# EAGLE board RHA2132_headstage (EAGLE 6.2)
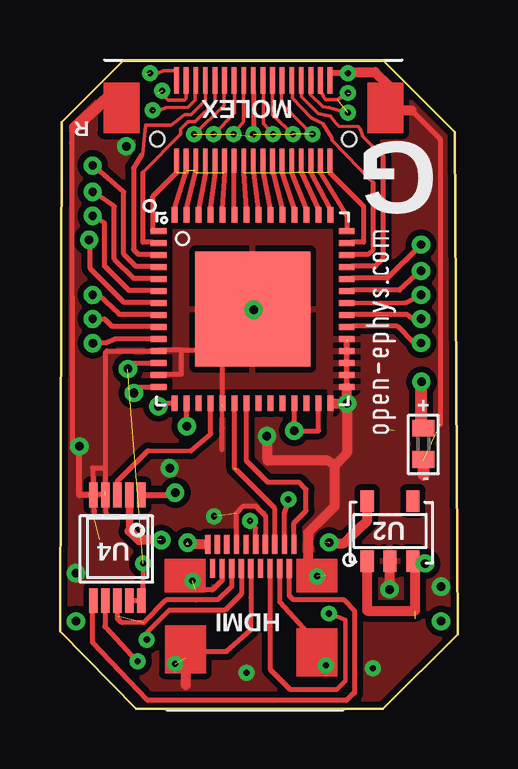
[diagram p0: board, top side]
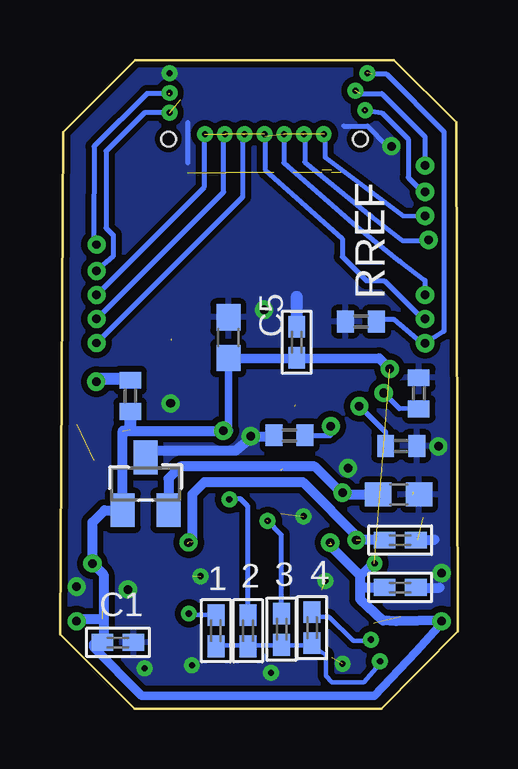
[diagram p1: board, bottom side, seen from below]

Size 16.59 x 27.06 mm. Coordinates in mm from the lower left corner, seen from the top.
Outline: 2.66,27.06 13.46,27.06 16.46,24.06 16.59,3.12 13.47,0 3.18,0 0,3.24 0.06,24.46 2.66,27.06
Copper layers (1*16): Top 0.0178mm / dielectric 59mil / Bottom 0.0178mm
Design rules: minimum track width 5mil, minimum drill 10mil, track to track 5mil, track to pad 5mil, pad to pad 5mil, via to via 5mil, smd to smd 0mil, copper to edge 5mil, drill to drill 10mil, minimum pad ring 8mil, minimum via ring 8mil, stop-mask expansion 3mil, vias tented up to drill 0mil, thermal gap 10mil
Net classes: 1 thick: width 1.016 mm; 2 power: width 0.61 mm

## Footprints (pad centres in the part's own frame; a part is rotated, then mirrored left to right if it is on the bottom)
C0402 = smd 0.9 x 0.7: 1 -0.65,0; 2 0.65,0
C0603 = smd 1.1 x 1: 1 -0.85,0; 2 0.85,0
MICRO_HDMI = smd 0.22 x 0.8: PIN1 1.8,1.4; PIN2 1.6,0.4; PIN3 1.4,1.4; PIN4 1.2,0.4; PIN5 1,1.4; PIN6 0.8,0.4; PIN7 0.6,1.4; PIN8 0.4,0.4; PIN9 0.2,1.4; PIN10 0,0.4; PIN11 -0.2,1.4; PIN12 -0.4,0.4; PIN13 -0.6,1.4; PIN14 -0.8,0.4; PIN15 -1,1.4; PIN16 -1.2,0.4; PIN17 -1.4,1.4; PIN18 -1.6,0.4; PIN19 -1.8,1.4
MOLEX_5033763410 = smd 0.2 x 1: P$1 -3.2,0.5; P$2 -2.8,0.5; P$3 -2.4,0.5; P$4 -2,0.5; P$5 -1.6,0.5; P$6 -1.2,0.5; P$7 -0.8,0.5; P$8 -0.4,0.5; P$9 0,0.5; P$10 0.4,0.5; P$11 0.8,0.5; P$12 1.2,0.5; P$13 1.6,0.5; P$14 2,0.5; P$15 2.4,0.5; P$16 2.8,0.5; P$17 3.2,0.5 | smd 0.2 x 1.1: P$18 3.2,-2.85; P$19 2.8,-2.85; P$20 2.4,-2.85; P$21 2,-2.85; P$22 1.6,-2.85; P$23 1.2,-2.85; P$24 0.8,-2.85; P$25 0.4,-2.85; P$26 0,-2.85; P$27 -0.4,-2.85; P$28 -0.8,-2.85; P$29 -1.2,-2.85; P$30 -1.6,-2.85; P$31 -2,-2.85; P$32 -2.4,-2.85; P$33 -2.8,-2.85; P$34 -3.2,-2.85 | hole 0.6: 4,-0.4; -4,-0.4
R0402 = smd 0.7 x 0.9: 1 -0.65,0; 2 0.65,0
TSOT-23-5 = smd 0.55 x 0.9: 1 -0.95,-1.25; 2 0,-1.25; 3 0.95,-1.25; 4 0.95,1.25; 5 -0.95,1.25
SOT23 = smd 1 x 1.4: 1 -0.95,-1.1; 2 0.95,-1.1; 3 0,1.1
MSOP-10 = smd 0.34 x 1.04: 1 -1,-2.2; 2 -0.5,-2.2; 3 0,-2.2; 4 0.5,-2.2; 5 1,-2.2; 6 1,2.2; 7 0.5,2.2; 8 0,2.2; 9 -0.5,2.2; 10 -1,2.2
QFN56_8_X_8 = smd 0.65 x 0.25: 1 -3.925,3.25; 2 -3.925,2.75; 3 -3.925,2.25; 4 -3.925,1.75; 5 -3.925,1.25; 6 -3.925,0.75; 7 -3.925,0.25; 8 -3.925,-0.25; 9 -3.925,-0.75; 10 -3.925,-1.25; 11 -3.925,-1.75; 12 -3.925,-2.25; 13 -3.925,-2.75; 14 -3.925,-3.25; 29 3.925,-3.25; 30 3.925,-2.75; 31 3.925,-2.25; 32 3.925,-1.75; 33 3.925,-1.25; 34 3.925,-0.75; 35 3.925,-0.25; 36 3.925,0.25; 37 3.925,0.75; 38 3.925,1.25; 39 3.925,1.75; 40 3.925,2.25; 41 3.925,2.75; 42 3.925,3.25 | smd 0.25 x 0.65: 15 -3.25,-3.925; 16 -2.75,-3.925; 17 -2.25,-3.925; 18 -1.75,-3.925; 19 -1.25,-3.925; 20 -0.75,-3.925; 21 -0.25,-3.925; 22 0.25,-3.925; 23 0.75,-3.925; 24 1.25,-3.925; 25 1.75,-3.925; 26 2.25,-3.925; 27 2.75,-3.925; 28 3.25,-3.925; 43 3.25,3.925; 44 2.75,3.925; 45 2.25,3.925; 46 1.75,3.925; 47 1.25,3.925; 48 0.75,3.925; 49 0.25,3.925; 50 -0.25,3.925; 51 -0.75,3.925; 52 -1.25,3.925; 53 -1.75,3.925; 54 -2.25,3.925; 55 -2.75,3.925; 56 -3.25,3.925 | smd 4.8 x 4.8: CENTER 0,0

## Placement (x,y rotation side)
1  [C0402]  10.08,3.26 270 bottom
2  [C0402]  8.75,3.26 270 bottom
3  [C0402]  7.35,3.32 270 bottom
4  [C0402]  6.07,3.39 270 bottom
C1  [C0402]  14.17,2.77 0 bottom
C5  [C0603]  9.56,15.48 90 bottom
C_ADC_1  [C0402]  2.4,5.07 0 bottom
C_REG  [C0402]  2.4,7.03 0 bottom
C_REG1  [C0402]  6.72,15.29 270 bottom
C_VREF  [C0603]  2.46,8.94 0 bottom
E$1  [MICRO_HDMI]  7.96,5.46 0 top
E$2  [MOLEX_5033763410]  8.06,23.36 180 top
LED  [R0402]  15.16,11.05 270 top
LED_R  [R0402]  13.66,13.05 270 bottom
RH1  RH1  [R0402]  1.63,13.16 270 bottom
RH2  RH2  [R0402]  2.36,10.96 180 bottom
RL  RL  [R0402]  7.02,11.41 0 bottom
RREF  [R0402]  4.04,16.15 180 bottom
U2  ADP1710  [TSOT-23-5]  13.76,7.42 0 top
U3  ADR381  [SOT23]  13.02,9.38 0 bottom
U4  AD7980-MSOP  [MSOP-10]  2.4,6.72 180 top
U5  RHA2132QFN  [QFN56_8_X_8]  8.04,16.68 0 top

## Library data of the parts
1-4 C1 C_ADC_1 C_REG C_REG1 U2-U4 = harrison
C5 C_VREF = rcl
E$1 E$2 = voigts
LED LED_R RH1 RH2 RL RREF = rcl-ez
U5 = intan

## Nets
AGND: C1.2 C5.2 C_VREF.2 RH1.1 RH2.1 RREF.2 U2.2 U4.4 U4.5 U5.11 U5.13 U5.28 U5.29 U5.30 U5.31 U5.32 U5.33 U5.CENTER
MUX_OUT: U4.3 U5.18
REFERENCE: U5.10
RESET: U5.20
S$1: RL.1
S$4: C_ADC_1.1
S$5: U4.9 U4.10
S$6: RREF.1
S$15: C_ADC_1.2
SCK: U4.8
SETH1: RH1.2 U5.14
SETH2: RH2.2 U5.15
SETL: RL.2 U5.16
V_REF: C_VREF.1 U3.2 U4.1
VDD: C1.1 C5.1 U2.1 U2.3 U3.1 U5.12 U5.25 U5.27
VREG_V: C_REG.1 U2.5 U4.2

## Tracks (layer width: path | path; a pad name or v marks a point on that pad's centre or on a via)
AGND  (via drill 0.25, 0.26 pad 0.25, 0.35, 0.36)  (10 unrouted)
  Top 0.178: 6.77,12.68 6.77,11.7 6.77,11.66
  Top 0.2: 1.46,8.96 1.86,8.96 | 4.26,13.96 5.06,13.96 5.06,14.96 | 5.06,14.96 4.1,14.96 4.11,14.96 4.26,14.96 | 5.06,14.96 5.86,14.96 | 6.76,5.56 6.76,5.36 6.36,4.96 5.66,4.96 | 1.86,10.06 1.36,10.06 1.43,7.99 | 11.96,13.26 11.96,15.36 | 14.66,24.96 15.86,23.76 15.86,11.86 | 2.06,25.46 1.96,25.46 | 0.63,24.25 0.48,24.11 0.48,23.6 0.5,10.88 0.86,10.96 | 6.79,12.61 6.79,14.76 | 1.86,9.06 1.93,8.06 | 7.36,7.16 7.36,8.16 7.66,8.46 8.16,8.46 8.56,8.06 8.56,7.06
  Top 0.203: U4.4 1.9,14.88 | 1.94,14.92 1.96,14.93 U5.11 | 6.77,11.7 6.74,11.67 6.74,10.81
  Top 0.254: U4.5 0.81,8.92 v0.81,10.95 | 11.96,14.77 U5.33
  Top 0.406: 11.06,5.56 10.26,5.56 | U2.2 13.76,5.28 v13.76,4.98 | 10.36,6.06 10.36,7.36 11.46,8.46 11.46,10.16 | 11.39,12.74 v11.96,12.74 U5.29 | 11.96,12.46 11.96,10.66 11.46,10.16 | 11.46,10.16 11.16,10.36 8.66,10.36 8.66,11.36 | 14.16,24.96 14.66,24.96 | 5.25,2.14 5.25,0.99
  Top 0.5: 15.16,10.36 15.16,9.76
  Top 0.508: 1.96,25.46 0.63,24.25
  Bottom 0.2: 11.26,24.46 11.26,22.76 | 4.76,24.31 3.76,24.31 2.96,23.46
  Bottom 0.406: 8.56,11.36 7.96,11.36 | 12.96,10.76 9.26,10.76 8.66,11.26 | 1.66,7.06 0.96,7.06 | 1.66,5.06 0.76,5.06
  Bottom 0.508: 6.71,15.98 6.71,17.18
  other vias: 8.08,16.64 10.73,5.54 0.67,5.66 4.58,10.04 12.01,26.51 6.43,8.04 5.53,5.34 8.63,11.37 2.76,23.46 11.09,1.82 15.9,5.1 7.79,1.5 13.06,1.69 4.8,1.88
  pour Bottom (isolate 0.254): 2.76,27.36 0.16,24.86 -0.14,2.69 2.86,-0.31 13.61,-0.31 17.16,2.94 17.06,24.16 13.76,27.36
  pour Top (isolate 0.254): 0.16,28.26 16.56,28.36 16.76,2.83 13.6,-0.19 3.05,-0.13 0.06,2.99
CNV
  Top 0.2: 12.26,0.68 11.94,0.35 3.66,0.35 1.36,2.78 1.36,4.26
MUX_OUT
  Top 0.203: U4.3 2.4,9.5 3.68,10.78 5.46,10.76 5.47,10.77 6.29,11.47 U5.18
N$1  (9 unrouted)
  Top 0.2: 8.86,22.36 8.86,22.46 9.26,20.86 | 7.66,22.36 7.76,20.86 | 8.06,22.36 8.26,20.86 | 8.46,22.36 8.76,20.86 | 9.26,22.36 9.76,20.86 | 9.66,22.36 10.26,20.86 | 10.06,22.36 10.76,20.86 | 10.46,22.36 11.26,20.86 | 10.86,22.36 11.96,20.56 11.96,19.96 | 11.26,22.36 12.66,20.96 12.66,19.46 12.16,19.46
N$8
  Top 0.2: 1.46,16.26 1.86,16.26 2.16,15.96 3.96,15.96
REFERENCE
  Top 0.203: U5.10 2.31,15.43 1.93,15.26 1.35,15.26
RESET  (1 unrouted)
  Top 0.2: 8.96,6.96 8.96,8.36 7.36,9.96
  Top 0.203: 7.29,10.03 U5.20
S$2  (via drill 0.35)
  other vias: 1.36,22.66
S$3
  Top 0.2: 3.96,16.46 2.46,16.46 1.62,17.26 1.32,17.26
S$4
  Bottom 0.406: 4.03,5.07 C_ADC_1.1
S$5
  Top 0.203: 3.49,6.04 3.43,4.83 U4.10 | U4.10 2.89,4.5 | U4.10 U4.9
S$6  (via drill 0.36)
  Top 0.203: 1.14,15.4 v1.37,15.25
  Bottom 0.203: RREF.1 3.16,16.26 2.66,16.25 1.43,15.21 v1.37,15.25 0.58,15.75
S$7  (via drill 0.26 pad 0.25)
  other vias: 7.93,7.84
S$8
  Top 0.2: 2.26,18.76 2.26,20.96 1.39,21.58
S$9  (via drill 0.36)
  other vias: 15.08,13.64
S$10
  Bottom 0.5: 13.76,13.76 15.06,13.76
S$11
  Top 0.2: 7.26,20.86 7.26,22.46
S$12
  Bottom 0.5: 13.66,12.26 13.66,11.76
S$13
  Top 0.2: 4.06,16.96 2.66,16.96 1.26,18.36 1.26,19.76 1.46,19.66
S$14
  Top 0.5: 15.06,11.86 15.06,13.56
S$16
  Top 0.178: 11.6,0.86 11.91,1.18 11.91,3.72 11.28,3.96 11.15,3.98
S$17
  Top 0.203: 3.48,3.61 2.58,3.6 2.39,3.79
S$19
  Top 0.2: 1.86,4.51 1.88,3.47 1.88,3.42 3.21,1.96 3.26,1.96
S$20  (via drill 0.26 pad 0.25)
  other vias: 9.53,8.74
S$21  (via drill 0.36)  (2 unrouted)
  Top 0.406: 6.06,6.86 5.26,6.86
  Bottom 0.406: 5.36,6.86 4.06,5.56 4.06,4.57 3.11,3.68 2.58,3.66 0.7,3.68
  other vias: 5.33,6.94
S$22  (via drill 0.26 pad 0.25)
  other vias: 3.62,2.89
S$23  (via drill 0.35)
  other vias: 1.36,16.26
S$25
  Top 0.178: 4.55,4.1 3.66,3.21 3.66,2.9
S$27
  Top 0.2: 3.96,17.46 2.86,17.46 1.86,18.46 1.86,20.26 1.38,20.56
S$28  (via drill 0.36)
  other vias: 0.67,3.65
S$29
  Bottom 0.178: 3.15,2.01 3.91,1.12 5.25,1.12 5.5,1.37 5.5,2.26 6.13,2.64 10.2,2.64 10.2,2.83
S$30  (via drill 0.36)
  other vias: 15.9,3.65
S$31
  Top 0.203: 6.92,2.39 7.94,3.27 7.96,4.65 7.96,5.69
S$32
  Top 0.2: 9.16,5.66 9.16,4.46 10.34,3.16
S$33
  Top 0.2: 4.06,18.96 3.26,18.96 3.06,19.16 3.06,22.56 3.41,23.11
S$34
  Top 0.2: 3.96,18.46 3.16,18.46 2.66,18.96 2.66,21.56 1.35,22.69
S$35
  Top 0.2: 2.26,18.76 3.06,17.96 4.06,17.96
S$36  (via drill 0.25)  (6 unrouted)
  Top 0.2: 8.06,25.76 v8.06,23.96
  Bottom 0.2: v8.06,23.96 8.06,23.86 8.03,23.86 8.03,22.49 4.81,19.61 4.81,18.86 3.81,17.86 3.06,17.86 2.06,16.86 1.46,16.26
  other vias: 5.59,23.96 6.41,23.96 7.24,23.96 8.89,23.96 9.71,23.96 10.54,23.96
S$37
  Top 0.2: 12.16,17.96 13.66,17.96 15.06,19.36
S$40
  Top 0.2: 3.86,19.46 3.46,19.46 3.46,22.36
S$41
  Top 0.2: 15.05,18.27 14.16,17.46 12.16,17.46
S$42
  Top 0.2: 13.46,23.06 13.46,18.76 13.16,18.46 12.16,18.46
S$43
  Top 0.2: 12.14,16.93 14.4,16.94 14.49,16.96 15.06,17.26
S$44  (via drill 0.25)
  other vias: 11.21,3.98
S$45
  Top 0.2: 12.16,16.46 14.46,16.46 14.7,16.29 15.1,16.29
S$46  (via drill 0.35)  (1 unrouted)
  Top 0.15: 7.66,25.76 7.66,24.48 7.24,23.96
  Bottom 0.2: 7.26,23.96 7.25,23.96 7.25,22.77 4.21,20.11 2.43,18.68 1.36,17.87 v1.36,17.26
S$47  (1 unrouted)
  Top 0.15: 6.44,23.96 7.29,24.86 7.29,25.76
  Bottom 0.2: 6.46,23.96 6.37,23.96 6.37,22.81 3.61,20.56 2.31,19.53 1.26,19.52
S$48  (5 unrouted)
  Top 0.2: 6.86,22.36 6.76,20.86 | 6.46,22.36 6.26,20.86 | 6.06,22.36 5.76,20.76 | 5.26,20.86 5.66,22.46 5.66,22.36 | 4.76,20.86 5.26,22.46 5.26,22.36 | 4.86,22.36 3.86,21.36 3.86,19.96
S$49  (via drill 0.25)  (2 unrouted)
  Top 0.15: 4.88,26.61 4.31,26.61 4.14,26.53 3.76,26.53
  Bottom 0.2: 0.56,15.77 0.56,24.06 2.96,26.46 3.56,26.46
  other vias: 3.76,26.51
S$50  (via drill 0.25)  (2 unrouted)
  Top 0.15: 5.26,25.76 5.26,25.46 5.19,25.38 4.51,25.38 4.36,25.53 4.29,25.78
  Bottom 0.2: 4.06,25.66 3.16,25.66 1.36,23.86 1.36,22.76
  other vias: 4.26,25.78
S$51  (1 unrouted)
  Top 0.15: 5.59,23.96 6.84,25.16 6.84,25.68
  Bottom 0.2: 5.56,23.96 5.53,23.96 5.53,23 2.28,20.57 1.35,20.56
S$52  (via drill 0.25)  (1 unrouted)
  Top 0.15: 3.88,24.95 4.15,24.97 4.42,25.08 5.34,25.08 5.64,25.38 5.64,25.76
  Bottom 0.2: v3.86,24.96 3.16,24.86 2.06,23.76 2.06,22.16 1.46,21.56
S$53
  Top 0.15: 6.46,25.76 6.46,25.31 5.64,24.48 5.34,24.48 5.04,24.18 5.04,23.96 3.46,22.38
S$54
  Top 0.15: 6.09,25.76 6.06,25.68 6.06,25.38 5.46,24.78 5.19,24.78 4.64,24.33 3.56,24.33 3.44,23.11 3.09,22.53
S$55  (via drill 0.35)  (1 unrouted)
  Top 0.15: 8.49,25.83 8.49,24.41 8.89,23.96
  Top 0.2: v15.06,15.26 14.76,15.26 14.06,15.96 12.16,15.96
  Bottom 0.2: v15.06,15.26 8.96,21.36 8.96,23.96
S$56  (via drill 0.35)  (1 unrouted)
  Top 0.15: 8.86,25.76 8.86,24.78 9.69,23.96
  Bottom 0.2: v15.06,16.26 9.76,21.56 9.76,23.96
S$57  (via drill 0.35)  (1 unrouted)
  Top 0.15: 9.24,25.76 9.24,25.23 10.51,23.96
  Bottom 0.2: v15.06,17.26 10.56,21.76 10.56,23.96
S$58
  Top 0.254: 11.34,26.52 12.17,26.52
S$60
  Top 0.15: 10.44,25.68 10.44,25.61 10.96,25.11 11.24,25.07 11.96,24.86
S$61
  Top 0.15: 10.06,25.76 10.06,25.53 10.77,24.82 11.27,24.72 11.5,24.41 11.64,24.29 12.44,24.28 12.54,24.18 12.64,23.86 13.44,23.06 13.44,22.23
S$62
  Top 0.15: 13.06,21.93 11.34,23.71 11.34,23.81 10.96,24.41 10.46,24.66 9.69,25.46 9.69,25.76
  Top 0.2: 12.16,18.96 12.86,18.96 13.06,19.16 13.06,21.93
S$64  (via drill 0.25)  (3 unrouted)
  Top 0.15: 10.89,25.68 10.86,25.81 10.96,25.58 10.99,25.53 11.06,25.41 11.56,25.41 11.91,25.61 12.01,25.66
  Bottom 0.2: 12.06,25.66 12.96,25.66 15.16,23.46 15.18,19.49
  other vias: 12.01,25.68 12.01,24.86
S$67
  Top 0.178: 11.21,4.04 11.28,3.91
S$68  (via drill 0.35)
  other vias: 1.36,21.56
S$69  (via drill 0.35)
  other vias: 1.36,20.56
S$70  (via drill 0.35)
  other vias: 1.21,19.56
S$75
  Top 0.2: 13.69,26 13.56,25.96
  Top 0.406: 12.07,26.56 13.14,26.56 13.69,26
S$76  (via drill 0.35)
  other vias: 15.06,19.36
S$77  (via drill 0.35)
  other vias: 15.06,18.26
S$81
  Bottom 0.2: 12.06,24.86 13.06,24.86 14.66,23.26 14.66,20.06 14.36,19.76 14.37,18.87 15.06,18.28
S$82
  Bottom 0.178: 10.9,3.91 10.26,3.91 10.13,4.04
S$83
  Bottom 0.178: 3.59,2.83 4.36,2.83 5.37,3.85 6.07,3.85
S$84
  Top 0.178: 5.44,2.39 5.25,2.01
  Top 0.203: 6.96,2.39 5.44,2.39
S$86
  Bottom 0.356: 4.17,5.63 3.98,5.63 3.53,6.07
S$87
  Bottom 0.356: 0.67,3.66 0.61,3.66 1.75,2.39 3.47,0.55 13.18,0.55 15.22,2.58
S$88
  Top 0.2: 9.56,5.76 9.56,4.72 9.74,4.55 11.84,4.55 12.29,4.09 12.29,0.67
SCK  (1 unrouted)
  Top 0.2: 7.16,5.66 7.16,5.09 6.59,4.55 5.69,4.55 4.43,4.54 3.5,3.6
  Top 0.203: 2.4,3.86 U4.8
SD01
  Top 0.2: 9.36,7.06 9.37,8.17 9.56,8.76 9.55,8.76
SDO  (via drill 0.26 pad 0.25)
  other vias: 3.24,1.98
SDO1
  Bottom 0.2: 8.76,3.8 8.76,8.46 9.06,8.76 9.46,8.76
SDO2
  Top 0.2: 8.76,5.66 8.76,1.65 9.59,0.83 11.55,0.83
SDO3  (1 unrouted)
  Top 0.2: 8.16,7.06 8.17,7.53 8.06,7.66 7.91,7.83
  Bottom 0.2: 7.96,7.86 7.36,7.26 7.36,3.96
SDO4
  Top 0.2: 7.56,5.66 7.56,4.8 6.88,4.12 4.56,4.12
SETH1  (via drill 0.36)
  Top 0.203: U5.14 3.09,13.43 v3.09,13.17
  Bottom 0.203: RH1.2 2.44,12.52 v3.09,13.17
SETH2  (via drill 0.36)
  Top 0.203: U5.15 4.1,12.75 v4.1,12.62
  Bottom 0.203: RH2.2 3.01,11.53 v4.1,12.62
SETL  (via drill 0.36)
  Top 0.203: v5.29,11.79 U5.16
  Bottom 0.203: RL.2 5.29,11.41 v5.29,11.79
STEP
  Top 0.2: 7.76,12.56 7.76,10.36 8.66,9.46 9.96,9.46 10.26,9.16 10.26,8.26 9.76,7.76 9.76,7.06
V_REF  (via drill 0.36)
  Top 0.254: U4.1 4.81,8.92
  Top 0.406: 4.81,8.92 v4.81,9.02
  Bottom 0.406: U3.2 12.07,9.61 11.57,10.11 5.96,10.11 4.86,9.02 | C_VREF.1 4.81,8.94 v4.81,9.02
  Bottom 0.508: v4.81,9.02 4.86,9.02
VDD  (via drill 0.25, 0.36)  (3 unrouted)
  Top 0.203: U5.27 10.79,11.6 v9.77,11.6 9.79,11.6 U5.25 | U5.12 2.83,14.43 v2.83,14.18
  Top 0.406: 14.81,6.07 14.81,4.1 12.81,4.1 U2.1 | U2.3 14.81,6.07 | 14.81,6.07 v15.23,6.07
  Bottom 0.2: 13.66,11.66 13.66,12.26
  Bottom 0.203: 15.18,2.71 C1.1
  Bottom 0.305: 9.56,11.6 C5.1
  Bottom 0.406: 9.56,11.6 v9.77,11.6 13.97,11.6 U3.1 14.73,8.29 15.23,7.79 v15.23,6.07 14.77,5.6 14.77,2.83 15.18,2.71 | C5.1 3.27,14.62 v2.83,14.18 | 15.86,3.76 14.82,3.76
  other vias: 3.47,6.07
VREG_V  (via drill 0.36)  (3 unrouted)
  Top 0.305: 2.9,7.42 U4.2
  Top 0.406: U2.5 12.81,7.84 12.1,7.15 11.85,6.9 11.26,6.9 | 2.9,7.42 3.28,7.04 v4.23,7.04
  Bottom 0.203: C_REG.1
  Bottom 0.406: 11.06,6.96 11.06,8.96 10.56,9.46 6.46,9.46 4.06,7.06 | C_REG.1 v4.23,7.04
  other vias: 11.23,6.94

## Text on the board
tDocu: +
_tsilk: MOLEX | R | G | + | - | U2 | U4 | HDMI
_bsilk: R | G | june 2012 | revision 1 | 32ch headstage | R0 | C10 | C5 | RLED | RH1 | RL | RH2 | U3 | C3 | C4 | R7 | C1 | C2
216bmp: /Users/Josh/Documents/MIT/04 Notes/open ephys/headstage/board_logo_2.bmp